# Altium PCB Pocket_Organ_V19_2021-09-19.pcbdoc (part 2 of 3)
Units mil, origin at the board's own origin, x right, y up, seen from the top; angles counter-clockwise.
Board outline 7303.06 x 4993.89 mil, 2 copper layers (Top Layer, Bottom Layer); 194 components, 271 nets, 792 pads, 208 vias.
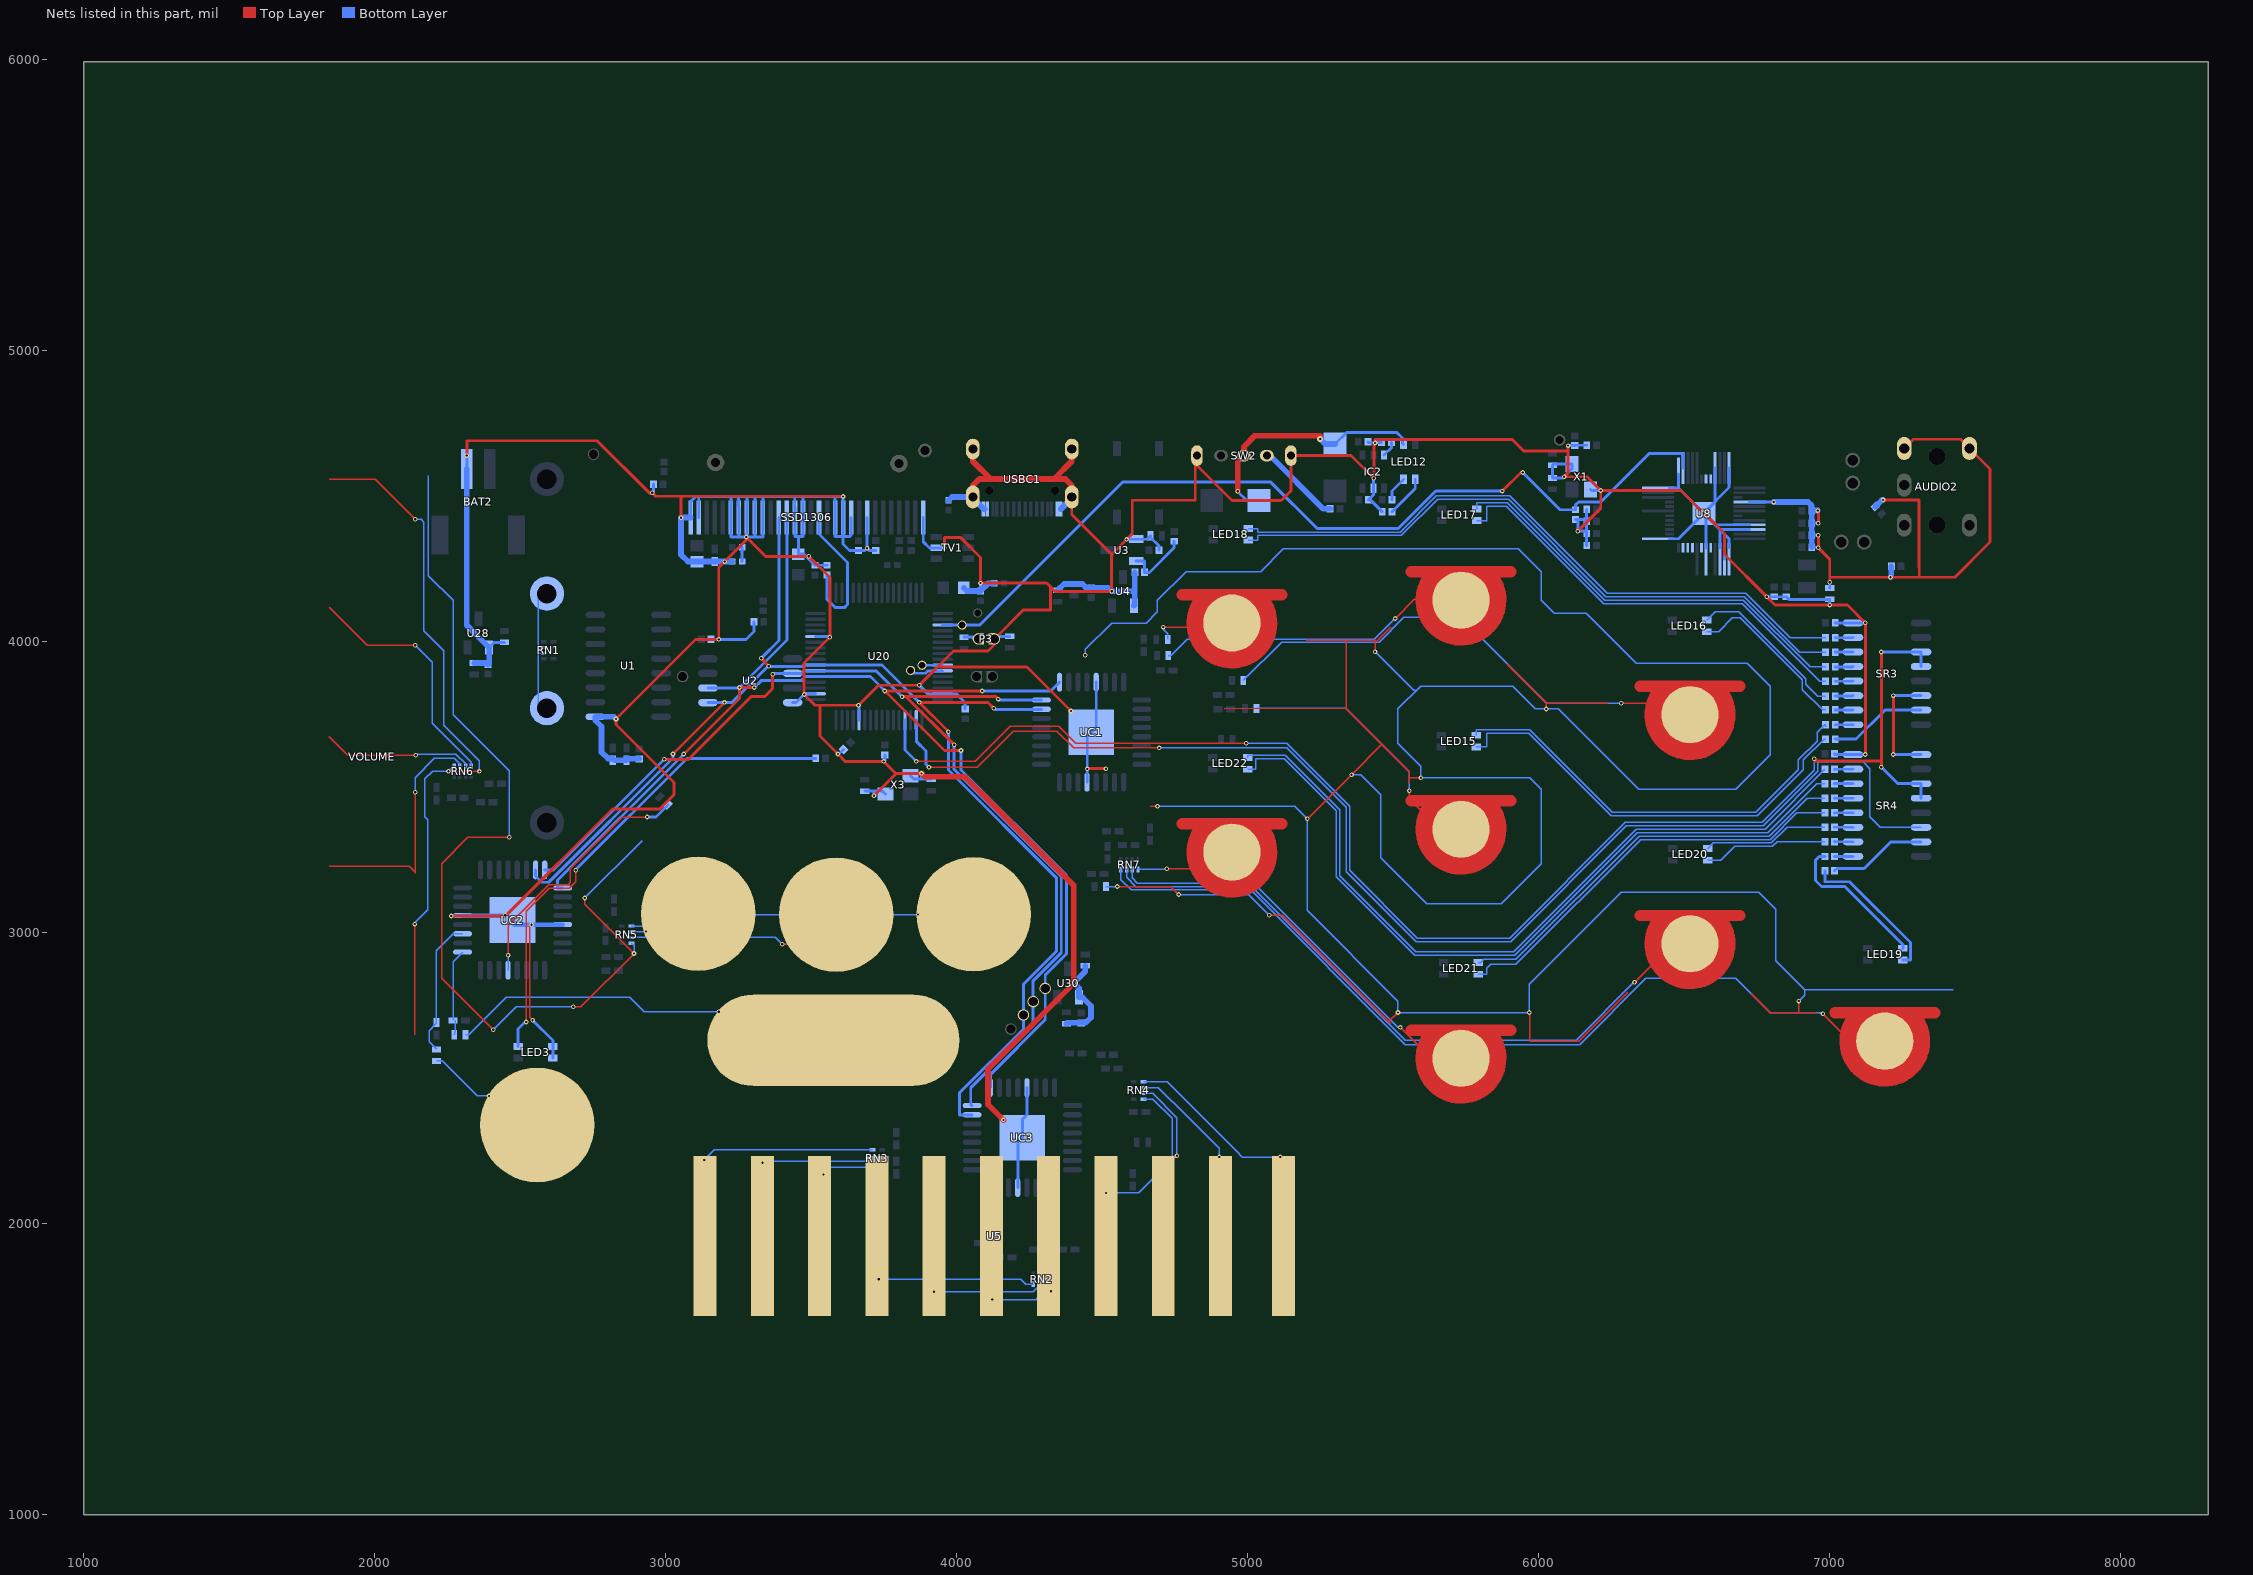
[diagram p2: the nets of this part, all layers, seen from the top]

## Via types
v1: diameter 15.75, hole 7.87, Top Layer to Bottom Layer, 165 vias
v2: diameter 20, hole 7.87, Top Layer to Bottom Layer, 43 vias

## Nets (pads, with @x,y where several pads share a name; then routed paths per layer and width w, separated by ;. In a path a pad name is that pad's centre, name@x,y a point inside that pad or via, vN(x,y) a via of type N, cw(c..) or ccw(c..) an arc to the next point about the centre after c; other vN are vias at no path point) (continued)
GND: BAT2.2 C1.1 C2.2 C3.1 C7.2 C10.2 C11.1 C12.1 C16.1 C17.1 C22.1 C29.1 C30.1 C31.1 C32.2 C33.2 C34.1 C35.1 C38.2 C39.1 C40.1 C43.1 C46.1 C48.2 C49.2 C50.1 C51.2 C52.1 C53.1 C54.1 C55.1 C56.1 C57.1 C60.2 C61.1 C62.2 C63.1 C64.1 C79.1 C80.2 C81.1 C83.1 C84.1 C86.1 IC2.2 LED3.2 LED3.4 P3.2 pad.4 R2.1 R4.1 R5.2 R7.1 R11.1 R12.2 R13.1 R31.2 R35.1 R52.2 R56.2 SR3.8 SR4.8 SSD1306.1 SSD1306.8 SSD1306.10 SSD1306.11 SSD1306.12 SSD1306.16 SSD1306.17 SSD1306.21 SSD1306.22 SSD1306.23 SSD1306.24 SSD1306.25 SSD1306.29 SSD1306.30 SW2.4 SW2.5 TV1.2 U1.1 U2.4 U3.1 U4.1 U8.9 U8.10 U8.13 U8.14 U8.15 U8.18 U8.25 U8.36 U8.37 U8.45 U8.48 U8.PAD U20.12 U20.18 U20.28 U20.63 U28.1 U30.1 UC1.5 UC1.21 UC2.5 UC2.21 UC3.5 UC3.21 USBC1.0 USBC1.A1 USBC1.A12 USBC1.B1 USBC1.B12 X1.2 X1.4 X3.2 X3.4 | length 25746.5
  Top Layer w5: v1(2539.36,3027.68) 2533.46,3021.77 2533.46,2708.47 v1(2543.06,2698.89)
  Top Layer w10: v1(2263.77,3057.21) 2445.77,3057.21 v1(2448.81,3060.25) 2452.76,3060.25 2817.58,3425.07 2980.27,3425.07 3029.56,3474.37 3029.56,3515.77 2829.67,3715.67 v1(2829.71,3734.41) ; v1@2316.96,4639.87 2316.96,4691.07 2764.86,4691.07 2943.96,4511.97 v1@2954.76,4511.97 ; v1(2829.71,3734.41) 3103.3,4007.99 v1(3183.06,4007.99) 3183.06,4255.17 v1(3203.56,4275.67) 3277.55,4349.66 v1(3277.55,4360.15) 3344.28,4293.43 v1(3492.12,4293.43) 3564.96,4220.59 v1(3564.95,4015.87) 3476.37,3927.29 v1(3476.37,3818.81) 3513.57,3781.62 v1(3663.38,3781.62) 3732.28,3850.51 v1(3872.04,3850.51) 3990.15,3968.62 4108.26,3968.62 4130.38,3990.75 P3.2@4130.39,4009.96 ; v1(2954.72,4511.93) 2966.48,4500.17 3059.96,4500.17 ; v1(3053.14,4426.39) 3053.14,4493.32 3059.94,4500.12 v1(3610.23,4499.22) ; 3531.01,3781.62 3531.01,3675.59 v1(3592.51,3614.09) 3617.9,3588.7 v1(3749.99,3588.7) 3791.33,3547.37 3793.3,3547.37 ; v1(3879.91,3547.37) 3793.3,3547.37 ; 3941.42,3913.51 4242.12,3913.51 v1(4393.69,3761.93) ; v1(3958.65,4322.75) 3958.65,4358.89 4013.06,4358.89 4082.67,4289.28 v1(4082.67,4201.77) 4310.18,4201.77 4323.06,4188.89 ; P3.2@4130.39,4009.96 4229.56,4109.17 4323.06,4109.17 4323.06,4188.89 ; USBC1.0@4396.45,4497.92 4396.45,4437.43 4533.45,4300.43 ; v1@4449.57,3563.82 v1(4513.77,3563.82) ; SW2.4@5149.54,4639.87 5149.54,4518.85 5116.14,4485.44 4946.84,4485.44 4826.75,4605.53 4826.75,4639.87 4820.86,4639.87 4820.86,4486.37 4604.36,4486.37 4604.33,4371.31 v1(4584.79,4351.77) 4533.45,4300.43 ; SW2.4@5149.56,4639.87 5356.67,4639.89 v1(5434.79,4561.77) ; v1(5434.79,4561.77) 5434.8,4679.02 v1(5438.96,4683.19) ; v1(5438.96,4683.19) 5438.96,4694.97 5910.56,4694.97 5949.86,4655.67 6102.36,4655.67 v1(6102.35,4674.37) 6102.35,4580.83 6088.58,4567.05 6167.32,4567.05 v1(6214.56,4519.81) ; v1(6135.81,4380.04) 6214.56,4458.79 v1(6214.56,4519.81) ; v1(7124,3612.33) v1(7124,4064.89) 7062.78,4126.11 v1(7001.96,4126.11) 6814,4126.11 v1(6785.42,4154.68) 6639.75,4300.35 6639.75,4372.17 6570.14,4441.77 v1(6564.79,4441.77) 6564.8,4445.16 6503.92,4506.03 6490.15,4519.81 v1(6214.56,4519.81) ; 3793.3,3547.37 v1(3716.53,3470.59) 3793.3,3547.37 ; 4323.06,4188.89 4338.81,4173.14 v1(4533.45,4173.14) 4533.45,4300.43
  Top Layer w19.68: v1(3879.91,3547.37) 3891.76,3535.57 4029.56,3535.57 4127.96,3437.17 4403.56,3161.57 v1(4403.56,2826.87) 4108.26,2531.57 4108.26,2409.57 v1@4161.36,2356.47
  Top Layer w20: USBC1.0@4056.26,4497.97 4056.26,4536.77 4078.76,4559.17 4373.96,4559.17 4396.46,4536.77 USBC1.0@4396.46,4497.97 ; USBC1.0@4056.29,4662.49 4056.29,4620.43 4117.55,4559.18 ; 4335.2,4559.18 4396.45,4620.43 USBC1.0@4396.45,4662.49
  Bottom Layer w7.87: USBC1.A1@4094.48,4455.89 USBC1.B12@4104.97,4455.89
  Bottom Layer w10: v1(2263.77,3057.21) 2265,3058.43 UC2.5@2302.41,3058.43 ; BAT2.2@2316.92,4593.61 v1(2316.92,4639.88) ; U28.1@2393.69,3980.24 2411.39,3997.94 C30.1@2446.84,3997.94 ; v1(2543.06,2698.89) 2613.06,2628.87 LED3.2@2613.06,2608.89 ; LED3.4@2613.06,2568.89 LED3.2@2613.06,2608.89 ; v1(2954.72,4511.93) 2958.09,4515.31 R35.1@2958.1,4541.77 ; SSD1306.30@3086.6,4427.28 3086.6,4482.4 3104.32,4500.12 3114.16,4498.17 ; SSD1306.29@3114.21,4427.27 3114.16,4499.17 v1@3610.26,4499.17 ; C61.1@3156.46,4007.99 v1(3183.06,4007.99) 3276.48,4007.99 3304.16,4035.68 R11.1@3304.16,4068.12 ; 3225.72,4498.17 3225.72,4428.6 3224.4,4427.28 3224.41,4360.36 3251.96,4360.36 ; 3251.26,4498.17 SSD1306.24@3252.01,4427.27 ; SSD1306.24@3252.01,4427.27 3251.97,4360.15 v1(3277.55,4360.15) ; 3280.54,4498.17 3279.52,4497.15 3279.52,4427.28 3279.52,4362.12 v1(3277.55,4360.15) ; SSD1306.22@3307.13,4427.27 3307.16,4498.17 ; SSD1306.22@3307.13,4427.27 3307.08,4362.32 3309.05,4360.36 ; SSD1306.21@3334.69,4427.27 3334.96,4498.17 ; SSD1306.21@3334.64,4427.28 3334.64,4360.36 3309.05,4360.36 ; U2.4@3436.99,3791.05 3448.62,3791.05 v1(3476.37,3818.81) 3479.04,3821.47 U20.18@3515.56,3821.47 ; 3444.26,4498.17 SSD1306.17@3444.92,4427.27 3444.86,4362.37 3472.46,4362.37 SSD1306.16@3472.48,4427.27 3472.06,4498.17 ; 3457.86,4362.37 3456.68,4361.19 C2.2@3456.69,4301.3 3475.35,4301.31 C35.1@3513.77,4262.88 ; v1(3492.12,4293.43) 3513.78,4271.77 C35.1@3513.77,4262.88 R12.2@3555.11,4262.88 ; U20.28@3515.57,4018.28 3562.55,4018.27 v1(3564.95,4015.87) ; 3582.36,4498.17 SSD1306.12@3582.72,4427.27 ; SSD1306.12@3582.72,4427.27 3582.67,4362.32 3610.23,4362.32 ; v1(3592.51,3614.09) 3596.25,3614.09 C64.1@3612.2,3630.05 ; SSD1306.11@3610.22,4427.28 3610.23,4362.32 ; 3610.26,4362.37 3633.86,4362.07 3637.76,4366.07 SSD1306.10@3637.83,4427.27 ; SSD1306.11@3610.23,4427.28 v1(3610.23,4499.22) ; v1(3663.38,3781.62) 3665.17,3779.82 U20.12@3665.17,3730.88 ; C81.1@3685.03,3486.34 3746.03,3486.34 X3.4@3755.89,3476.5 ; SSD1306.8@3692.86,4427.27 v1(3692.86,4320.97) ; v1(3716.53,3470.59) 3716.53,3486.34 ; C38.2@3722.44,4314.13 3699.7,4314.13 v1(3692.86,4320.97) ; v1(3749.99,3588.7) 3753.93,3592.64 C43.1@3753.93,3611.37 ; X3.2@3842.51,3539.5 3854.3,3527.69 C80.2@3913.37,3527.68 ; v1(3872.04,3850.51) 3901.14,3821.42 U20.63@3952.57,3821.43 3999.56,3821.42 4029.52,3791.46 C46.1@4029.52,3768.79 ; v1(3879.91,3547.37) 3879.91,3529.88 3882.1,3527.69 ; SSD1306.1@3885.76,4427.27 3885.76,4343.87 3906.96,4322.77 TV1.2@3931.05,4322.76 ; TV1.2@3931.05,4322.76 v1(3958.65,4322.75) ; C40.1@4082.67,4174.3 v1(4082.67,4201.77) ; P3.2@4130.39,4009.96 4139,4018.57 R31.2@4183.06,4018.57 ; UC3.5@4211.37,2123.4 4211.37,2280.4 pad.4@4226.37,2295.4 ; pad.4@4226.37,2295.4 4226.36,2358.27 4242.36,2374.27 UC3.21@4242.36,2467.37 ; UC1.5@4449.57,3517.09 v1(4449.56,3562.82) 4449.57,3675.39 pad.4@4463.06,3688.89 4480.57,3706.39 UC1.21@4480.57,3861.09 ; v1(4584.79,4351.77) U3.1@4618.09,4352.48 ; U3.1@4618.09,4352.48 4655.52,4352.48 C50.1@4667.31,4364.3 ; C50.1@4667.36,4364.27 4667.36,4358.37 4695.86,4329.87 C1.1@4695.86,4315.07 ; C33.2@5414.33,4687.13 5416.3,4685.16 v1(5438.96,4683.19) 5440.94,4685.16 R52.2@5461.64,4685.16 ; IC2.2@5433.06,4527.73 5433.06,4560.04 v1(5434.79,4561.77) ; IC2.2@5433.06,4527.73 5433.06,4505.03 C32.2@5416.3,4488.27 5422.26,4488.27 R56.2@5463.6,4446.93 ; v1(6102.35,4674.37) C57.1@6125.97,4674.36 C56.1@6166.36,4675.32 ; v1@6135.76,4380.07 6135.76,4420.47 6127.96,4420.47 6156.46,4420.43 6166.36,4410.52 C54.1@6166.36,4330.83 C55.1@6166.36,4372.17 ; v1(6135.81,4380.04) 6158.5,4380.04 C55.1@6166.36,4372.17 ; C49.2@6166.36,4454.84 C48.2@6166.36,4413.51 C55.1@6166.36,4372.17 ; X1.2@6179.13,4523.75 6183.08,4519.81 v1(6214.56,4519.81) ; U8.25@6450.89,4354.07 6481.89,4354.07 6503.92,4376.1 U8.PAD@6568.89,4441.06 ; U8.36@6450.89,4528.07 6481.89,4528.07 6503.92,4506.03 ; U8.37@6481.86,4576.87 6481.86,4528.09 6503.92,4506.03 ; 6503.93,4506.03 U8.PAD@6568.89,4441.06 ; U8.PAD@6568.89,4441.06 6655.86,4354.07 U8.13@6655.86,4323.07 ; U8.PAD@6568.89,4441.06 6503.92,4506.03 ; U8.18@6576.89,4323.07 6576.89,4433.07 U8.PAD@6568.89,4441.06 ; U8.45@6607.89,4596.57 6607.89,4480.07 U8.PAD@6568.89,4441.06 ; U8.15@6623.89,4323.07 6623.89,4386.07 ; U8.14@6639.89,4283.58 6639.89,4370.06 6623.89,4386.07 ; U8.48@6655.89,4596.57 6655.89,4530.04 6568.89,4443.04 U8.PAD@6568.89,4441.06 ; U8.10@6726.37,4386.06 6623.89,4386.07 ; U8.9@6726.37,4402.06 6607.89,4402.07 U8.PAD@6568.89,4441.06 ; v1(6785.42,4154.68) C53.1@6811.01,4154.68 6852.35,4154.68 6861.23,4145.8 R2.1@7001.96,4145.79 v1(7001.96,4126.11) ; C62.2@7018.66,3614.3 7020.83,3612.14 SR4.8@7081.81,3612.13 7082.01,3612.33 v1(7124,3612.33) ; C60.2@7020.66,4065.07 SR3.8@7081.81,4064.89 ; SR3.8@7081.81,4064.89 v1(7124,4064.89) ; v1(3277.55,4360.15) 3277.76,4360.36 3309.05,4360.36 ; 3610.23,4362.32 3610.23,4336.52 3632.84,4313.92 C39.1@3663.38,4313.92 3685.81,4313.92 v1(3692.86,4320.97) ; U8.PAD@6568.89,4441.06 6623.89,4386.07 ; U8.PAD@6568.89,4441.06 6623.89,4386.07 ; C12.1@6049.21,4563.12 6084.64,4563.11 6088.58,4567.05 6116.14,4594.6 X1.4@6116.14,4610.36 6053.15,4610.37 C11.1@6049.21,4606.42 C12.1@6049.21,4563.12
  Bottom Layer w15.75: UC2.5@2302.41,3058.43 2446.99,3058.43 v1(2448.81,3060.25) ; pad.4@2474.4,3043.43 2465.64,3043.43 v1(2448.81,3060.25) ; UC2.21@2646.41,3027.43 2481.63,3027.43 v1(2448.81,3060.25)
  Bottom Layer w19.68: BAT2.2@2316.97,4593.57 2316.97,4056.97 U28.1@2393.69,3980.24 2393.69,3926.05 C31.1@2389.76,3922.12 2389.76,3927.07 C29.1@2342.52,3927.08 ; C86.1@2818.86,3599.07 2801.97,3599.07 2779.56,3619.97 2779.56,3708.57 2758.95,3729.18 2758.95,3742.23 2821.89,3742.23 v1(2829.71,3734.41) ; C86.1@2818.89,3599.08 2825.34,3592.63 C84.1@2866.13,3592.63 ; C84.1@2864.16,3599.09 2864.16,3594.6 C84.1@2866.13,3592.63 ; C83.1@2909.44,3597.39 2870.89,3597.39 C84.1@2866.13,3592.63 ; 3053.17,4393.87 v1@3053.17,4426.39 ; SSD1306.30@3086.56,4427.27 3054.03,4427.27 v1(3053.14,4426.39) ; R4.1@3229.02,4275.67 C22.1@3169.26,4275.71 3108.47,4275.7 C51.2@3108.26,4275.5 3077.04,4275.5 3053.14,4299.4 v1(3053.14,4426.39) ; C79.1@4025.58,4185.16 4036.44,4174.3 C40.1@4082.67,4174.3 ; C40.1@4082.67,4174.3 4109.28,4200.91 R7.1@4130.62,4200.87 ; C16.1@4348.46,4177.07 4370.06,4198.77 4403.56,4198.77 4433.06,4198.77 4446.16,4185.57 C7.2@4463.06,4185.59 ; C63.1@4377.94,2687.13 4380.93,2690.12 C10.2@4429.13,2690.12 4443.93,2690.12 4462.59,2708.78 4462.59,2748.15 4433.05,2777.69 U30.1@4421.25,2777.69 4421.25,2809.18 v1(4403.56,2826.87) 4442.9,2866.21 C34.1@4442.9,2885.95 ; C7.2@4463.06,4185.59 4521.01,4185.59 v1(4533.45,4173.14) 4613.22,4173.14 ; U4.1@4610.23,4124.15 4613.22,4127.14 C3.1@4613.21,4238.31
  Bottom Layer w20: R5.2@3972.43,4485.67 3984.69,4497.93 USBC1.0@4056.29,4497.93 4056.29,4494.09 USBC1.A1@4094.48,4455.9 ; USBC1.A12@4358.26,4455.86 4396.45,4494.09 USBC1.0@4396.45,4497.93
  other v1: 4161.41,2356.42 3492.12,4293.43 6088.58,4567.05
GNDA: AUDIO2.1 C44.2 C45.2 C58.2 C59.2 R2.2 R53.1 R54.1 U8.4 | length 2402.6
  Top Layer w10: v1(6960.61,4450.91) 6962.59,4448.94 v1(6962.58,4407.6) ; v1(6962.58,4366.26) v1(6962.59,4322.96) 7001.96,4283.59 v1(7001.95,4204.84) ; 7001.96,4263.87 7001.96,4221.67 7210.66,4221.67 7432.17,4221.67 7553.14,4342.65 7553.14,4593.7 AUDIO2.1@7482.27,4664.58 7450.76,4696.07 7289.36,4696.07 AUDIO2.1@7257.86,4664.58 ; v1@7185.06,4487.37 7309.06,4487.37 7309.06,4286.57 7309.46,4221.67
  Bottom Layer w10: U8.4@6726.36,4480.47 6726.6,4480.23 v1(6809.04,4480.23) ; C58.2@6939.92,4324.92 6960.63,4324.92 v1(6962.59,4322.96) ; C59.2@6939.92,4366.26 v1(6962.58,4366.26) ; C45.2@6939.92,4407.6 v1(6962.58,4407.6) ; R2.2@7001.96,4185.16 v1(7001.95,4204.84)
  Bottom Layer w19.68: v1(6809.04,4480.23) 6927.15,4480.23 6939.92,4467.45 C44.2@6939.93,4450.91 ; C58.2@6939.92,4324.92 C59.2@6939.92,4366.26 C45.2@6939.92,4407.6 C44.2@6939.93,4450.91 v1(6960.61,4450.91) ; R54.1@7158.11,4464.39 7181.12,4487.41 v1(7185.03,4487.41) ; v1(7210.62,4221.66) 7213.6,4224.64 R53.1@7213.61,4259.07
IC2_6: IC2.6 R52.1 | length 53.8
  Bottom Layer w10: IC2.6@5470.06,4641.73 5495.03,4666.7 R52.1@5495.04,4685.16
INSTR_1: INSTR.1 RN1.2 | length 233.2
  Bottom Layer w5: RN1.2@2581.63,3980.21 2563.06,3980.23 2563.06,4165.48 INSTR.1@2592.46,4165.47
LED12_2: LED12.2 R56.1 | length 144.4
  Bottom Layer w10: R56.1@5497,4446.93 5577.08,4527.01 LED12.2@5577.08,4558.19
LED12_4: LED12.4 R57.1 | length 86.5
  Bottom Layer w10: R57.1@5497,4488.27 5497,4518.11 LED12.4@5537.08,4558.19
LOOP_1: LOOP.1 RN1.3 | length 236.7
  Bottom Layer w5: RN1.3@2581.63,3960.53 2563.06,3960.54 2563.06,3771.77 LOOP.1@2592.46,3771.77
MINOR_1: MINOR.1 R36.1 | length 1379.5
  Top Layer w5: v1(3183.06,2728.47) 3281.49,2630.04 MINOR.1@3576.76,2630.04
  Bottom Layer w5: R36.1@2312.75,2648.89 2323.06,2648.87 2453.06,2778.87 2876.76,2778.87 2927.16,2728.47 v1(3183.06,2728.47)
NC: U8.17 U8.19 U8.21 U8.22 U8.23 U8.43 U8.44
PW_LED: D1.2 D4.2 LED12.3 pad.7 SW2.2 | length 875.7
  Top Layer w19.68: v1(4966.53,4516.94) 4966.53,4618.23 SW2.2@4988.16,4639.87
  Top Layer w20: SW2.2@4988.16,4639.87 4988.16,4670.47 5025.56,4707.87 5249.96,4707.87 v2(5249.99,4696.97)
  Bottom Layer w10: v1(4966.53,4516.94) 4998.03,4485.44 D1.2@5039.66,4485.44 ; pad.7@5301.17,4679.5 5341.36,4719.67 5513.76,4719.67 5533.46,4699.97 5533.46,4681.77 LED12.3@5537.08,4678.19
  Bottom Layer w20: v2(5249.99,4696.97) 5267.45,4679.51 pad.7@5301.17,4679.5
R1_2: LED3.1 R1.2 | length 1716
  Top Layer w5: v1@2521.66,2692.87 2521.66,3074.07 2601.06,3153.47 2669.26,3153.47 2690.96,3175.07 v1@2690.96,3214.47
  Bottom Layer w10: LED3.1@2493.06,2608.89 2493.06,2668.89 2517,2692.83 v1(2521.64,2692.83) ; v1(2690.93,3214.48) 2690.93,3216.45 3073.38,3598.89 R1.2@3516.36,3598.89
R3_1: R3.1 R4.2 | length 49.2
  Bottom Layer w10: R4.2@3263.1,4275.67 R3.1@3263.09,4324.92
R6_2: P3.1 R6.2 | length 52.2
  Bottom Layer w10: R6.2@4025.58,4015.66 4069.69,4015.66 P3.1@4075.39,4009.96
R19_1: C.1 R19.1 | length 288.2
  Top Layer w5: v1(4710.62,4050.4) 4926.19,4050.4 C.1@4942.86,4067.07
  Bottom Layer w5: v1@4710.66,4050.37 4710.66,4042.57 4726.36,4026.77 R19.1@4726.37,4007.79
R20_1: D.1 R20.1 | length 1080
  Top Layer w5: v1(5507.86,4079.93) 5573.7,4145.77 D.1@5728.37,4145.77
  Bottom Layer w5: R20.1@4728.36,3952.67 4736.86,3952.67 4793.26,4009.07 5436.96,4009.07 v1@5507.86,4079.97
R21_1: E.1 R21.1 | length 1750.8
  Top Layer w5: v1(6285.42,3788.59) 6473.34,3788.59 E.1@6509.84,3752.09
  Bottom Layer w5: R21.1@4986.16,3867.37 5117.86,3998.97 5452.56,3998.97 5537.36,4083.87 5734.26,4083.87 6029.56,3788.57 v1@6285.46,3788.57
R22_1: G.1 R22.1 | length 918.7
  Top Layer w5: v1(5557.08,3487.41) 5557.08,3459.85 5650.67,3366.27 G.1@5728.37,3366.27
  Bottom Layer w5: R22.1@5031.5,3770.88 5338.58,3770.88 5557.08,3552.37 v1(5557.08,3487.41)
R34_2: C27.2 R34.2 UC2.3 | length 474.7
  Bottom Layer w5: R34.2@2213.06,2598.57 2187,2624.63 2187,2662.85 2212.59,2688.45 2212.59,2690.67 2212.59,2938.42 2269.7,2995.53 UC2.3@2302.4,2995.53
R36_2: C28.2 R36.2 UC2.1 | length 297.5
  Bottom Layer w5: C28.2@2269.91,2698.27 2269.87,2899.99 UC2.1@2302.41,2932.53 ; R36.2@2273.38,2648.89 2276.34,2661.84 C28.2@2276.36,2698.31
R37_1: R37.1 UC2.29 | length 902.8
  Top Layer w5: v1(2458.66,2922.45) 2458.66,3025.47 2598.46,3165.27 2665.36,3165.27 2673.26,3173.17 2673.26,3220.37 2850.45,3397.55 v1@2937,3397.55
  Bottom Layer w5: v1(2458.66,2922.45) 2458.91,2922.2 UC2.29@2458.91,2870.93
  Bottom Layer w10: v1(2937,3397.55) 2966.8,3397.55 R37.1@3008.01,3438.75
R47_1: R47.1 SW2.3 | length 293.4
  Bottom Layer w19.68: SW2.3@5066.88,4639.87 5077.86,4639.87 5260.96,4456.77 R47.1@5284.47,4456.77
R48_1: C3.2 R48.1 U3.2 | length 227
  Bottom Layer w10: U3.2@4618.09,4277.68 4646.61,4277.68 C3.2@4646.61,4238.31 4663.38,4238.31 4748.02,4322.96 R48.1@4748.02,4345.62
R64_1: LED15.4 R64.1 | length 1494.1
  Bottom Layer w5: LED15.4@5786.37,3638.67 5822.86,3638.67 5822.86,3686.27 5966.56,3686.27 6249.96,3402.77 6753.46,3402.77 6911.36,3560.67 6911.36,3593.67 6983.16,3665.47 R64.1@6987.26,3665.47
R65_1: LED15.2 R65.1 | length 1505.7
  Bottom Layer w5: LED15.2@5786.37,3678.67 5786.36,3698.07 5970.46,3698.07 6253.96,3414.57 6747.96,3414.57 6893.66,3560.27 6893.66,3593.67 6958.66,3658.67 6958.66,3688.17 6985.16,3714.67 6987.26,3714.67 R65.1@6987.26,3707.87
R66_1: LED16.4 R66.1 | length 577.8
  Bottom Layer w5: LED16.4@6579.68,4034.34 6619.75,4034.34 6667.31,4081.9 6694.87,4081.9 6907.47,3869.3 6907.47,3835.84 6977.44,3765.87 R66.1@6987.22,3765.87
R69_1: LED16.2 R69.1 | length 551.5
  Bottom Layer w5: LED16.2@6579.68,4074.34 6608.89,4103.56 6688.97,4103.56 6919.28,3873.24 6919.28,3853.56 6959.73,3813.11 R69.1@6987.23,3813.11
R72_1: LED17.4 R72.1 | length 1499.9
  Bottom Layer w5: LED17.4@5788.34,4416.23 5821.18,4416.23 5822.83,4414.58 5822.83,4465.76 5889.76,4465.76 6224.36,4131.07 6700.76,4131.07 6967.66,3864.27 R72.1@6987.26,3864.27
R73_1: LED17.2 R73.1 | length 1453.9
  Bottom Layer w5: LED17.2@5788.34,4456.23 5788.33,4477.57 5893.69,4477.57 6228.34,4142.93 6704.72,4142.93 6934.17,3913.47 R73.1@6987.26,3913.47
R76_1: LED18.4 R76.1 | length 2269.1
  Bottom Layer w5: LED18.4@5002.91,4349.3 5035.47,4349.31 5035.47,4365.37 5529.56,4365.37 5653.57,4489.37 5897.66,4489.37 6232.26,4154.77 6708.66,4154.77 6898.77,3964.67 R76.1@6987.26,3964.67
R78_1: LED18.2 R78.1 | length 2249.7
  Bottom Layer w5: LED18.2@5002.91,4389.3 5035.46,4389.27 5035.46,4377.17 5525.56,4377.17 5649.56,4501.17 5901.56,4501.17 6236.16,4166.57 6712.56,4166.57 6865.26,4013.87 R78.1@6987.26,4013.87
R79_1: LED19.4 R79.1 | length 504.8
  Bottom Layer w10: R79.1@6985.26,3212.77 6985.26,3175.07 7070.16,3175.07 7279.56,2965.77 7279.56,2906.37 LED19.4@7252.9,2906.39
R80_1: LED19.2 R80.1 | length 511.5
  Bottom Layer w10: R80.1@6985.27,3261.97 6966.07,3261.97 6953.06,3248.87 6953.06,3178.87 6973.06,3158.87 7053.57,3158.87 7252.9,2959.53 LED19.2@7252.9,2946.39
R81_1: LED20.4 R81.1 | length 429.9
  Bottom Layer w5: LED20.4@6581.66,3248.87 6627.56,3249.57 6674.46,3296.47 6804.36,3296.47 6821.06,3313.17 R81.1@6985.26,3313.17
R82_1: LED20.2 R82.1 | length 434.1
  Bottom Layer w5: LED20.2@6581.66,3288.87 6600.96,3308.27 6801.16,3308.27 6855.26,3362.37 R82.1@6985.26,3362.37
R83_1: LED21.4 R83.1 | length 1432.4
  Bottom Layer w5: LED21.4@5794.26,2857.17 5822.86,2857.17 5822.86,2877.17 5836.66,2890.97 5923.26,2890.97 6352.36,3320.07 6797.26,3320.07 6888.66,3411.57 R83.1@6985.26,3411.57
R84_1: LED21.2 R84.1 | length 1425.3
  Bottom Layer w5: LED21.2@5794.26,2897.17 5801.46,2897.17 5812.96,2908.67 5923.26,2908.67 6346.46,3331.87 6793.26,3331.87 6924.16,3462.77 R84.1@6985.26,3462.77
R85_1: LED22.4 R85.1 | length 2676
  Bottom Layer w5: LED22.4@5000.96,3561.87 5029.56,3561.87 5029.56,3597.67 5125.96,3597.67 5305.06,3418.47 5305.06,3193.07 5575.66,2922.47 5919.36,2922.47 6340.56,3343.67 6789.36,3343.67 6957.66,3511.97 R85.1@6985.26,3511.97
R86_1: LED22.2 R86.1 | length 2663.8
  Bottom Layer w5: LED22.2@5000.96,3601.87 5000.96,3609.47 5129.86,3609.47 5316.96,3422.47 5316.96,3196.07 5578.76,2934.27 5915.26,2934.27 6336.56,3355.57 6779.66,3355.57 R86.1@6985.26,3561.17
RN2_1: RN2.1 U5.4 | length 688.6
  Top Layer w10: U5.4@3726.53,1957.32 3726.53,1815.42 v1(3733.06,1808.89)
  Bottom Layer w5: v1(3733.06,1808.89) 4220.56,1808.87 4237.36,1792.07 RN2.1@4263.56,1792.07
RN2_2: RN2.2 U5.5 | length 566.8
  Top Layer w5: v1(3923.06,1765.66) U5.5@3923.38,1957.32
  Bottom Layer w5: v1(3923.06,1765.66) 4263.77,1765.66 4283.22,1785.12 RN2.2@4283.22,1792.06
RN2_3: RN2.3 U5.6 | length 435.1
  Top Layer w5: U5.6@4120.23,1957.32 4120.22,1741.73 v1(4123.06,1738.89)
  Bottom Layer w5: v1(4123.06,1738.89) 4273.06,1738.89 4302.9,1768.73 RN2.3@4302.9,1792.06
RN2_4: RN2.4 U5.7 | length 218.2
  Top Layer w5: U5.7@4317.08,1957.32 4317.08,1775.34 v1(4324.79,1767.63)
  Bottom Layer w5: RN2.4@4322.59,1792.06 4322.59,1769.83 v1(4324.79,1767.63)
RN3_1: RN3.1 U5.1 | length 855.3
  Top Layer w10: v1(3133.06,2218.89) 3135.97,2215.98 U5.1@3135.98,1957.32
  Bottom Layer w5: v1(3133.06,2218.89) 3167.48,2253.3 RN3.1@3711.33,2253.3
RN3_3: RN3.3 U5.2 | length 631.9
  Top Layer w10: U5.2@3332.86,1957.27 v1(3333.06,2208.89)
  Bottom Layer w5: v1(3333.06,2208.89) 3338.11,2213.93 RN3.3@3711.33,2213.93
RN3_4: RN3.4 U5.3 | length 395.8
  Top Layer w10: U5.3@3529.68,1957.32 3529.68,2155.51 v1(3543.06,2168.89)
  Bottom Layer w5: v1(3543.06,2168.89) 3568.43,2194.25 RN3.4@3711.28,2194.25
RN4_1: RN4.1 U5.8 | length 691.1
  Top Layer w5: v1(4513.77,2105.53) 4513.77,1957.46 U5.8@4513.96,1957.27
  Bottom Layer w5: v1@4513.76,2105.57 4625.96,2105.57 4742.16,2221.77 4742.16,2361.37 4675.46,2428.07 RN4.1@4643.19,2428.14
RN4_2: RN4.2 U5.9 | length 575.6
  Top Layer w5: U5.9@4710.78,1957.32 4710.78,2186.4 v1(4757.86,2233.48)
  Bottom Layer w5: RN4.2@4643.19,2447.83 4674.17,2447.78 4757.87,2364.09 v1(4757.86,2233.48)
RN4_3: RN4.3 U5.10 | length 649.7
  Top Layer w5: v1(4903.06,2228.89) 4907.63,2224.32 U5.10@4907.63,1957.32
  Bottom Layer w5: RN4.3@4643.19,2467.51 4694.48,2467.47 4793.06,2368.89 4903.06,2258.89 v1(4903.06,2228.89)
RN4_4: RN4.4 U5.11 | length 853
  Top Layer w5: v1(5113.06,2228.89) 5124.17,2217.78 U5.11@5124.17,1957.31
  Bottom Layer w5: RN4.4@4643.19,2487.2 4724.8,2487.15 4963.06,2248.89 4983.06,2228.89 v1(5113.06,2228.89)
RN5_6: 5.1 RN5.6 | length 755.8
  Top Layer w5: v1@3401.57,2959.86 3484.24,2959.86 5.1@3586.61,3062.22
  Bottom Layer w5: RN5.6@2882.97,2983.48 3377.95,2983.48 v1(3401.57,2959.85)
RN5_7: 3.1 RN5.7 | length 255.3
  Top Layer w10: v1(2933.06,3003.81) 3050.93,3003.81 3.1@3112.2,3065.08
  Bottom Layer w5: RN5.7@2882.97,3003.16 2933.06,3003.16 v1(2933.06,3003.81)
RN5_8: 7.1 RN5.8 | length 1192.7
  Top Layer w10: v1(3868.1,3062.22) 3869.01,3063.12 7.1@4059.05,3063.11
  Bottom Layer w5: RN5.8@2882.97,3022.85 3092.54,3022.85 3131.86,3062.17 v1(3868.1,3062.22)
RN6_1: RN6.1 VOLUME.4 | length 845.5
  Top Layer w5: 1844.48,4118.25 1974.42,3988.31 v1(2139.75,3988.31)
  Bottom Layer w5: v1(2139.75,3988.31) 2198.81,3929.26 2198.81,3720.39 2332.67,3586.53 RN6.1@2332.69,3571.9
RN6_2: RN6.2 VOLUME.3 | length 525.1
  Top Layer w5: VOLUME.3@1844.49,3669.43 1844.48,3673.35 1907.68,3610.15 v1(2141.72,3610.15)
  Bottom Layer w5: v1@2141.76,3610.17 2141.76,3614.07 2279.56,3614.07 2312.96,3580.67 RN6.2@2313.01,3571.9
RN6_3: RN6.3 VOLUME.2 | length 828.7
  Top Layer w5: VOLUME.2@1844.49,3228.49 2119.71,3228.49 2139.76,3208.45 ; 2139.76,3204.85 v1(2139.76,3482.4)
  Bottom Layer w5: v1(2139.76,3482.4) 2139.76,3533.37 2205.26,3598.87 2274.36,3598.87 2293.26,3579.97 RN6.3@2293.32,3571.9
RN6_4: RN6.4 VOLUME.1 | length 2450
  Top Layer w5: VOLUME.1@1844.49,4559.2 2001.94,4559.2 v1(2139.75,4421.38) ; v1(2137.79,3029.65) 2137.79,2651.72 2139.76,2649.76 ; v1(2253.93,3555.03) 2359.54,3555.03 v1(2360.23,3554.34)
  Bottom Layer w5: v1(2137.79,3029.65) 2137.79,3033.62 2183.06,3078.89 2183.06,3388.89 2173.06,3398.89 2173.06,3528.89 2199.21,3555.03 v1(2253.93,3555.03) 2270.77,3571.86 RN6.4@2273.64,3571.9 ; v1(2139.75,4421.38) 2159.46,4421.37 2169.26,4411.57 2169.26,4037.57 2238.16,3968.67 2238.16,3712.77 2360.26,3590.67 v1@2360.26,3554.37
RN7_1: B.1 RN7.1 | length 3085.7
  Top Layer w5: v1(6978.33,2721.67) 7081.11,2618.89 B.1@7193.06,2618.89
  Bottom Layer w5: RN7.1@4564.96,3217.37 4564.96,3182.27 4600.36,3146.87 5011.76,3146.87 5543.26,2615.37 6141.76,2615.37 6370.06,2843.67 6679.16,2843.67 6797.26,2725.57 6974.36,2725.57 v1@6978.36,2721.67
RN7_2: A.1 RN7.2 | length 2334.3
  Top Layer w5: v1(6330.7,2829.93) 6461.54,2960.77 A.1@6523.57,2960.77
  Bottom Layer w5: RN7.2@4584.67,3217.37 4584.67,3190.17 4616.16,3158.67 5015.76,3158.67 5543.26,2631.07 6129.87,2631.07 6328.73,2829.93 v1(6330.7,2829.93)
RN7_3: CC.1 RN7.3 | length 1412.4
  Top Layer w5: v1(5525.58,2674.42) 5623.13,2576.87 CC.1@5734.26,2576.87
  Bottom Layer w5: RN7.3@4604.26,3217.37 4604.26,3188.27 4622.06,3170.47 5021.66,3170.47 5517.71,2674.42 v1(5525.58,2674.42)
RN7_4: F.1 RN7.4 | length 341.1
  Top Layer w5: v1(4722.43,3219.7) 4884.99,3219.7 F.1@4940.96,3275.67
  Bottom Layer w5: RN7.4@4623.99,3217.34 4720.06,3217.33 v1(4722.43,3219.7)
RST_MIDI: pad.31 R13.2 U8.38 U20.51 | length 3089.4
  Top Layer w10: v1(5875.97,4517.84) 5940.03,4581.9 v1(5946.84,4581.9)
  Bottom Layer w10: U20.51@3952.56,4057.67 4080.06,4057.67 4570.86,4548.47 5080.66,4548.47 5239.26,4389.87 5519.66,4389.87 5647.66,4517.87 v1@5875.96,4517.87 ; v1(5946.84,4581.9) 6074.87,4453.87 6127.97,4453.87 6127.95,4470.6 6137.79,4480.44 6214.56,4480.44 6379.87,4645.74 6379.87,4647.77 6497.86,4647.77 U8.38@6497.89,4596.57
RST_OLED: R12.1 SSD1306.14 U20.35 | length 509.8
  Bottom Layer w10: SSD1306.14@3527.6,4427.27 3527.57,4370.17 3625.8,4271.93 U20.35@3625.8,4167.88 ; R12.1@3555.16,4229.47 3555.16,4145.77 3582.66,4118.27 3616.16,4118.27 3625.96,4128.07 U20.35@3625.8,4167.88
S$32: 
S$51: 
S$67: 
S$69: 
S$76: 
S$78: 
S$82: 
S$84: 
S$86: 
S$89: 
S$2850: 
S$2853: 
S$18198: 
S$18200: 
S$18205: 
S$18209: 
S$133904: 
S$146126: 
S$148393: 
S$148395: 
S$148397: 
S$148399: 
S$148401: 
S$148403: 
S$148405: 
S$148407: 
S$148409: 
S$148411: 
S$148413: 
S$148415: 
S$148417: 
S$148421: 
S$148423: 
S$148425: 
S$148427: 
S$148429: 
S$148431: 
S$148433: 
S$148435: 
S$148437: 
S$148441: 
S$148445: 
S$148447: 
S$148723: 
S$148969: 
S$148973: 
S$154509: 
S$154511: 
S$154513: 
S$154711: 
S$155222: 
S$155224: 
S$155276: 
S$155279: 
S$155283: 
S$155285: 
S$155331: 
S$155333: 
S$155472: 
S$155590: 
S$155592: 
S$155594: 
S$155625: 
SCL: pad.33 U20.58 | length 70.7
  Bottom Layer w10: pad.33@3881.88,3919.2 U20.58@3952.56,3919.87
SDA: pad.34 U20.59 | length 117.7
  Bottom Layer w10: pad.34@3842.51,3901.49 3852.35,3891.64 3893.69,3891.64 3902.22,3900.17 U20.59@3952.57,3900.17
SHIELD: R15.2 | length 14678.1
  Top Layer w5: v1@4553.16,3158.67 4736.26,3158.67 v1@4763.76,3131.17 ; 4665.35,3434.26 v1(4690.93,3434.26) ; 4921.26,3768.87 5338.56,3770.87 5537.36,3572.07 5557.08,3552.35 5557.08,3513 ; v1(5074.79,3060.25) 5120.07,3060.25 5493.2,2687.13 ; 5202.75,4005.13 5340.56,4005.17 ; v1(5206.3,3391.33) 5207.07,3391.33 v1(5358.26,3542.53) 5462.16,3647.27 ; 5340.56,3768.87 5340.56,4005.17 ; v1(5438.97,3965.76) 5438.97,4005.17 5340.56,4005.17 ; 5438.97,4002.21 5443.93,4002.21 5492.12,4050.4 ; 5486.8,2693.53 5486.8,2694.69 v1(5517.71,2725.6) ; 5557.06,3532.77 v1(5596.45,3532.69) ; 5893.66,3922.47 6027.56,3788.57 ; v1(5968.49,2725.6) 5970.47,2723.63 5970.47,2627.18 6139.75,2627.18 6307.08,2794.5 ; v1(6027.56,3768.91) 6027.56,3788.57 ; 6241.06,3788.57 6027.56,3788.57 ; 6732.28,2790.56 6797.24,2725.6 6954.72,2725.6 ; 6895.66,2725.6 v1(6895.66,2764.97)
  Bottom Layer w5: v1(4442.91,3953.95) 4442.86,3973.67 4533.46,4064.17 4651.56,4064.17 4690.96,4103.57 4690.96,4142.97 4789.36,4241.37 5045.26,4241.37 5123.96,4320.07 5931.06,4320.07 6009.86,4241.37 6009.86,4142.97 6055.06,4097.67 6165.36,4097.67 6336.56,3926.37 6718.46,3926.37 6797.26,3847.67 6797.26,3611.47 6679.16,3493.27 6344.46,3493.27 6068.86,3768.87 5990.16,3768.87 5911.36,3847.67 5596.46,3847.67 5517.66,3768.87 5517.66,3650.77 5596.46,3572.07 v1(5596.45,3532.69) ; R15.2@4513.77,3158.67 v1(4553.14,3158.67) ; v1(4690.93,3434.26) 5163.38,3434.26 v1(5206.3,3391.33) 5206.31,3076.37 5517.71,2764.97 v1(5517.71,2725.6) v1(5968.49,2725.6) 5968.49,2822.05 6285.43,3138.99 6757.87,3138.99 6816.92,3079.93 6816.92,2902.77 6915.35,2804.34 ; v1(4763.77,3131.12) 5003.92,3131.12 v1(5074.79,3060.25) ; v1(5358.26,3542.53) 5389.76,3542.53 5458.65,3473.63 5458.65,3257.1 5616.13,3099.62 5872.04,3099.62 6009.84,3237.41 6009.84,3493.32 5970.47,3532.69 v1@5596.45,3532.69 ; v1(5438.97,3965.76) 5571.79,3832.94 5581.73,3832.94 ; v1(6895.66,2764.97) 6915.35,2784.66 6915.35,2804.34 ; 7427.16,2804.34 6915.35,2804.34
SHIELD2: RN5.5 | length 3452.4
  Top Layer w5: v1@2407.47,2666.55 2230.31,2843.71 2230.31,3237.41 2320.85,3327.96 v1(2462.59,3327.96) ; v1(2683.06,2745.29) 2708.66,2745.29 v1(2891.73,2928.36) 2722.43,3097.66 v1(2722.43,3119.3)
  Bottom Layer w5: 2185.06,4570.07 2185.06,4227.57 2269.66,4142.97 2269.66,4132.87 ; 2269.68,4142.92 2269.68,3749.22 2462.59,3556.31 v1(2462.59,3327.96) ; v1@2407.47,2666.55 2486.21,2745.29 v1(2683.06,2745.29) ; v1(2722.43,3119.3) 2919.29,3316.15 ; RN5.5@2882.97,2963.79 2891.73,2955.03 v1(2891.73,2928.36)
  other v1: 2407.47,2666.55
SHIFT_1: R34.1 SHIFT.1 | length 437.2
  Top Layer w5: v1(2393.06,2438.89) 2493.1,2338.85 SHIFT.1@2558.99,2338.85
  Bottom Layer w5: R34.1@2213.06,2559.2 2232.75,2559.2 2353.06,2438.89 v1(2393.06,2438.89)
SPI_MISO: pad.21 U2.2 U20.22 UC1.16 UC2.16 UC3.16 | length 3834.7
  Top Layer w10: v1(2996.06,3596.58) 2998.03,3594.61 3076.77,3594.61 3293.3,3811.14 3340.54,3811.14 3368.11,3838.71 v1(3368.1,3887.92) ; v1(3992.12,3645.79) 3826.77,3811.14 v1(3812.98,3811.14) 4135.61,3811.14 v1(4143.69,3803.06)
  Bottom Layer w10: UC2.16@2584.41,3215.93 2615.41,3215.93 v1(2996.06,3596.58) ; v1(3368.1,3887.92) 3371.24,3891.05 U2.2@3436.99,3891.05 ; U2.2@3437,3891.05 3467.86,3891.07 3476.96,3900.17 U20.22@3515.57,3900.17 3675.49,3900.17 3723.96,3900.17 v1(3812.98,3811.14) ; v1@3992.16,3645.77 3992.16,3561.17 4360.26,3193.07 4360.26,2931.27 4263.76,2834.77 pad.21@4263.78,2763.01 4263.76,2681.27 4049.16,2466.67 4049.16,2410.07 UC3.16@4053.86,2405.37 ; v1(4143.69,3803.06) 4147.66,3799.09 UC1.16@4292.07,3799.09
SPI_MOSI: pad.22 SSD1306.19 U2.5 U20.23 UC1.15 UC2.15 UC3.15 | length 4549.9
  Top Layer w10: v1(3025.58,3614.29) v1@3202.75,3791.46 ; v1(3328.73,3943.03) 3354.32,3917.44 v1(3354.32,3915.47) ; v1(3972.43,3691.07) v1(3872.04,3791.46) 4108.26,3791.46 v1(4127.94,3771.77)
  Bottom Layer w10: UC2.15@2552.96,3215.97 2552.96,3195.27 2574.76,3173.37 2598.46,3173.37 3025.58,3600.49 v1(3025.58,3614.29) ; U2.5@3145.65,3791.05 3227.95,3791.05 3352.37,3915.47 3469.18,3915.47 3474.18,3919.87 3515.56,3919.87 3743.67,3919.84 v1(3872.04,3791.46) ; v1(3328.73,3943.03) 3389.76,4004.06 SSD1306.19@3389.8,4427.27 ; v1@3972.46,3691.07 3972.46,3559.17 4344.46,3187.17 4344.46,2937.17 4230.26,2822.97 pad.22@4230.26,2717 4230.26,2669.37 4009.86,2448.97 4009.86,2373.87 UC3.15@4053.86,2373.87 ; v1(4127.94,3771.77) 4132.13,3767.59 UC1.15@4292.07,3767.59
  other v1: 3202.75,3791.46
SPI_SCLK: pad.20 SSD1306.18 U2.6 U20.21 UC1.17 UC2.17 UC3.17 | length 4641.2
  Top Layer w10: v1(3062.98,3614.09) 3253.93,3805.04 v1(3253.93,3842.64) v1(3305.11,3842.64) ; v1(4015.74,3626.11) 3958.65,3626.11 v1(3753.93,3830.83) v1(4088.57,3830.83)
  Bottom Layer w10: UC2.17@2646.36,3153.37 2627.96,3153.37 2627.96,3179.07 v1(3062.98,3614.09) ; U2.6@3145.65,3841.05 3252.34,3841.05 v1(3253.93,3842.64) 3417.37,4006.07 SSD1306.18@3417.36,4427.27 ; v1@3305.16,3842.67 3328.76,3866.27 3466.76,3866.27 3480.96,3880.47 U20.21@3515.57,3880.48 3704.26,3880.47 v1@3753.96,3830.87 ; v1@4015.76,3626.07 4015.76,3559.27 4377.96,3197.07 4377.96,2927.27 4305.06,2854.47 4305.16,2808.27 4305.06,2701.17 4116.46,2511.97 UC3.17@4116.46,2467.37 ; v1(4088.57,3830.83) 4324.41,3830.83 UC1.17@4354.67,3861.09
SR3_1: R65.2 SR3.1 | length 61.3
  Bottom Layer w10: R65.2@7020.63,3714.69 7081.61,3714.69 SR3.1@7081.81,3714.89
SR3_2: R66.2 SR3.2 | length 61.1
  Bottom Layer w10: R66.2@7020.66,3765.87 SR3.2@7081.81,3764.89
SR3_3: R69.2 SR3.3 | length 61.9
  Bottom Layer w10: R69.2@7020.63,3813.11 7080.04,3813.12 SR3.3@7081.81,3814.89
SR3_4: R72.2 SR3.4 | length 61.1
  Bottom Layer w10: R72.2@7020.66,3864.27 SR3.4@7081.81,3864.89
SR3_5: R73.2 SR3.5 | length 61.8
  Bottom Layer w10: R73.2@7020.63,3913.51 7080.42,3913.5 SR3.5@7081.81,3914.89
SR3_6: R76.2 SR3.6 | length 61.3
  Bottom Layer w10: R76.2@7020.63,3964.69 7081.6,3964.68 SR3.6@7081.81,3964.89
SR3_7: R78.2 SR3.7 | length 61.1
  Bottom Layer w10: R78.2@7020.66,4013.87 SR3.7@7081.81,4014.89
SR3_14: SR3.14 SR4.9 | length 393.6
  Top Layer w10: v1(7220.46,3612.33) v1(7220.46,3815.08)
  Bottom Layer w10: v1(7220.46,3612.33) 7315.62,3612.33 SR4.9@7315.81,3612.13 ; v1(7220.46,3815.08) 7315.62,3815.08 SR3.14@7315.81,3814.89
SR3_15: R64.2 SR3.15 | length 336.4
  Bottom Layer w10: R64.2@7020.63,3665.48 7092.51,3665.47 7191.92,3764.89 SR3.15@7315.81,3764.89
SR4_1: R80.2 SR4.1 | length 63.2
  Bottom Layer w10: R80.2@7018.65,3261.93 SR4.1@7081.81,3262.13
SR4_2: R81.2 SR4.2 | length 63.2
  Bottom Layer w10: R81.2@7018.65,3313.12 SR4.2@7081.81,3312.13
SR4_3: R82.2 SR4.3 | length 63.2
  Bottom Layer w10: R82.2@7018.65,3362.33 SR4.3@7081.81,3362.13
SR4_4: R83.2 SR4.4 | length 63.2
  Bottom Layer w10: R83.2@7018.65,3411.54 SR4.4@7081.81,3412.13
SR4_5: R84.2 SR4.5 | length 63.2
  Bottom Layer w10: R84.2@7018.65,3462.72 SR4.5@7081.81,3462.13
SR4_6: R85.2 SR4.6 | length 63.2
  Bottom Layer w10: R85.2@7018.65,3511.93 7018.85,3512.14 SR4.6@7081.81,3512.13
SR4_7: R86.2 SR4.7 | length 63.2
  Bottom Layer w10: R86.2@7018.65,3561.15 SR4.7@7081.81,3562.13
SR4_15: R79.2 SR4.15 | length 338.3
  Bottom Layer w10: R79.2@7018.65,3212.72 7026.52,3220.59 7120.07,3220.59 7211.61,3312.14 SR4.15@7315.81,3312.13
SR-CLK: SR3.11 SR3.12 SR4.11 SR4.12 U20.4 | length 5055.4
  Top Layer w5: v1(3862.2,3588.7) 4064.96,3588.67 4185.07,3708.77 4352.37,3708.77 4410.34,3650.8 v1(4996.05,3650.8)
  Top Layer w10: v1(6948.81,3597.65) 6948.81,3590.47 7179.16,3590.47 v1@7179.16,3568.97 ; v1(7179.12,3569.02) v1(7179.12,3964.89)
  Bottom Layer w5: v1(4996.05,3650.8) 5135.82,3650.8 5352.36,3434.27 5352.36,3213.79 5584.64,2981.51 5901.56,2981.51 6299.2,3379.15 6769.68,3379.15 6948.81,3558.28 v1(6948.81,3597.65)
  Bottom Layer w10: U20.4@3822.65,3730.87 3822.65,3628.25 v1(3862.2,3588.7) ; v1(7179.12,3569.02) 7236.01,3512.13 SR4.11@7315.81,3512.13 SR4.12@7315.81,3462.13 ; v1(7179.12,3964.89) SR3.11@7315.81,3964.89 SR3.12@7315.81,3914.89
SR-DATA: SR4.14 U20.2 | length 4534.7
  Top Layer w5: v1(3905.5,3569.02) 4070.86,3568.97 4194.86,3693.07 4344.46,3693.07 4402.46,3635.07 v1@4696.86,3635.07
  Bottom Layer w5: v1@4696.86,3635.07 5135.86,3635.07 5340.56,3430.37 5340.56,3209.87 5580.66,2969.67 5905.46,2969.67 6303.16,3367.37 6773.66,3367.37 6960.96,3554.67 6960.96,3586.77 7116.16,3586.77 7139.76,3563.07 7139.76,3397.77 7175.36,3362.17 SR4.14@7315.76,3362.17
  Bottom Layer w10: U20.2@3862.06,3730.87 3862.06,3657.77 3895.66,3624.17 3895.66,3578.87 v1(3905.5,3569.02)
  other v1: 4696.84,3635.05